# EAGLE board me433_1 (EAGLE 8.1.0)
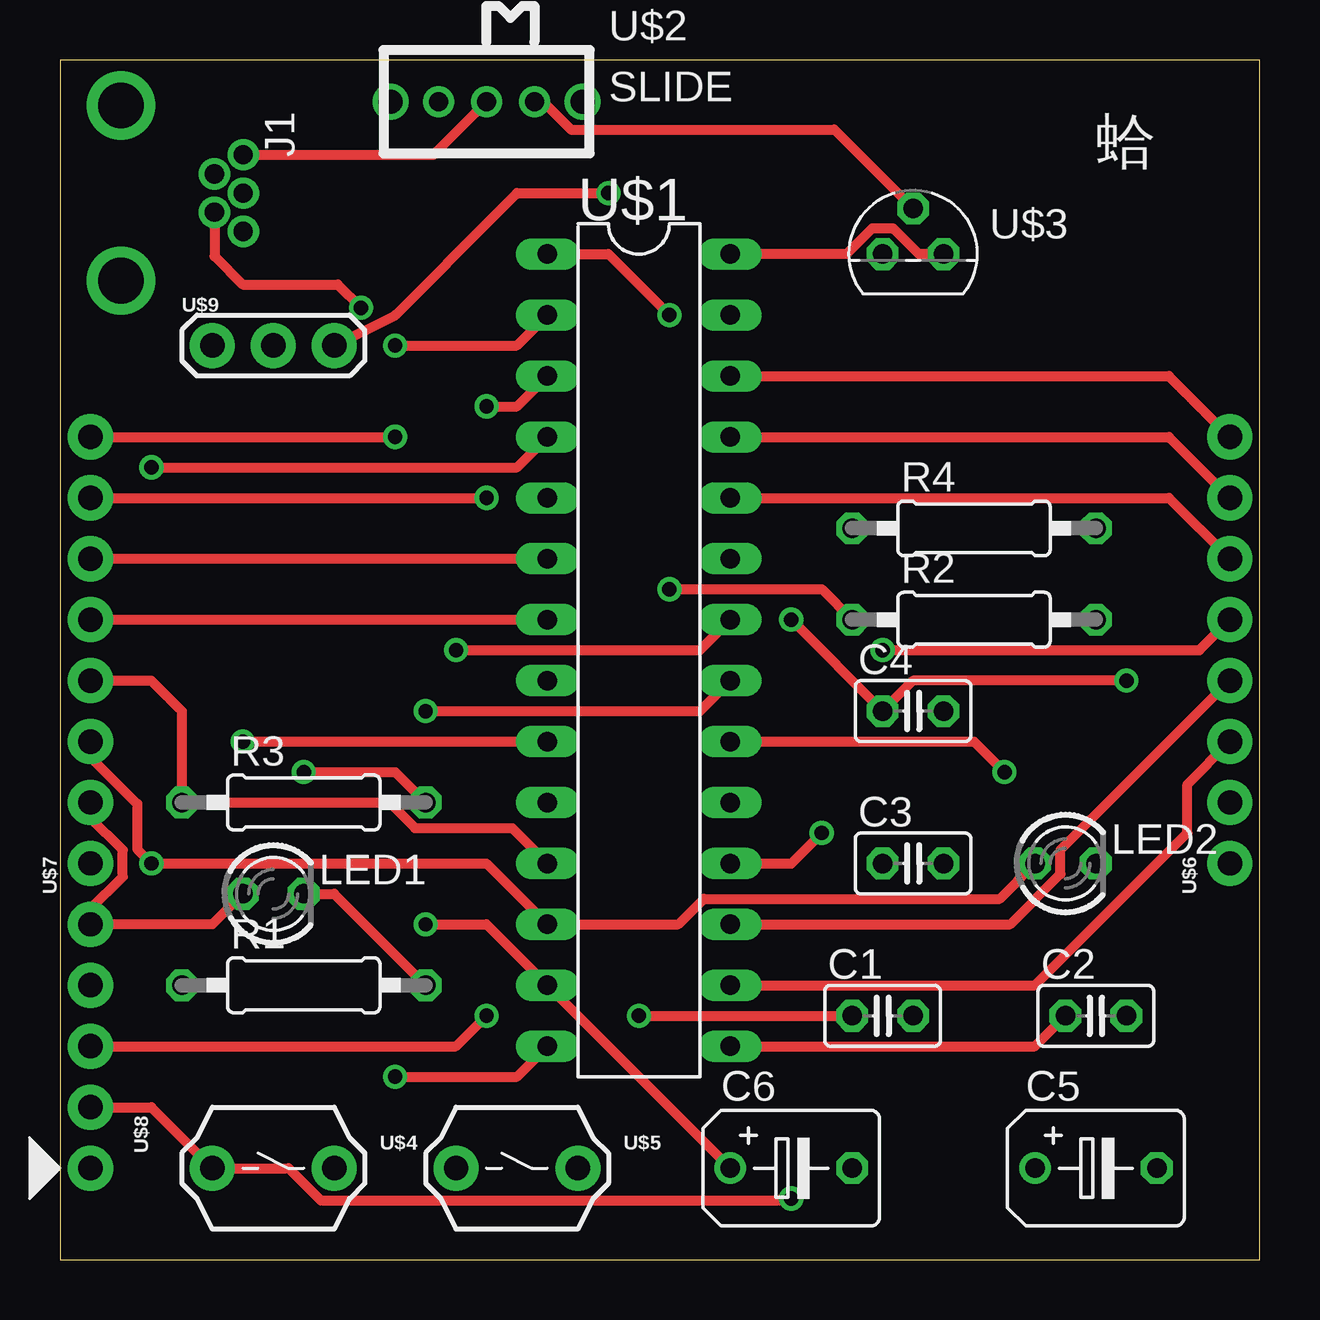
[diagram p0: board, top side]
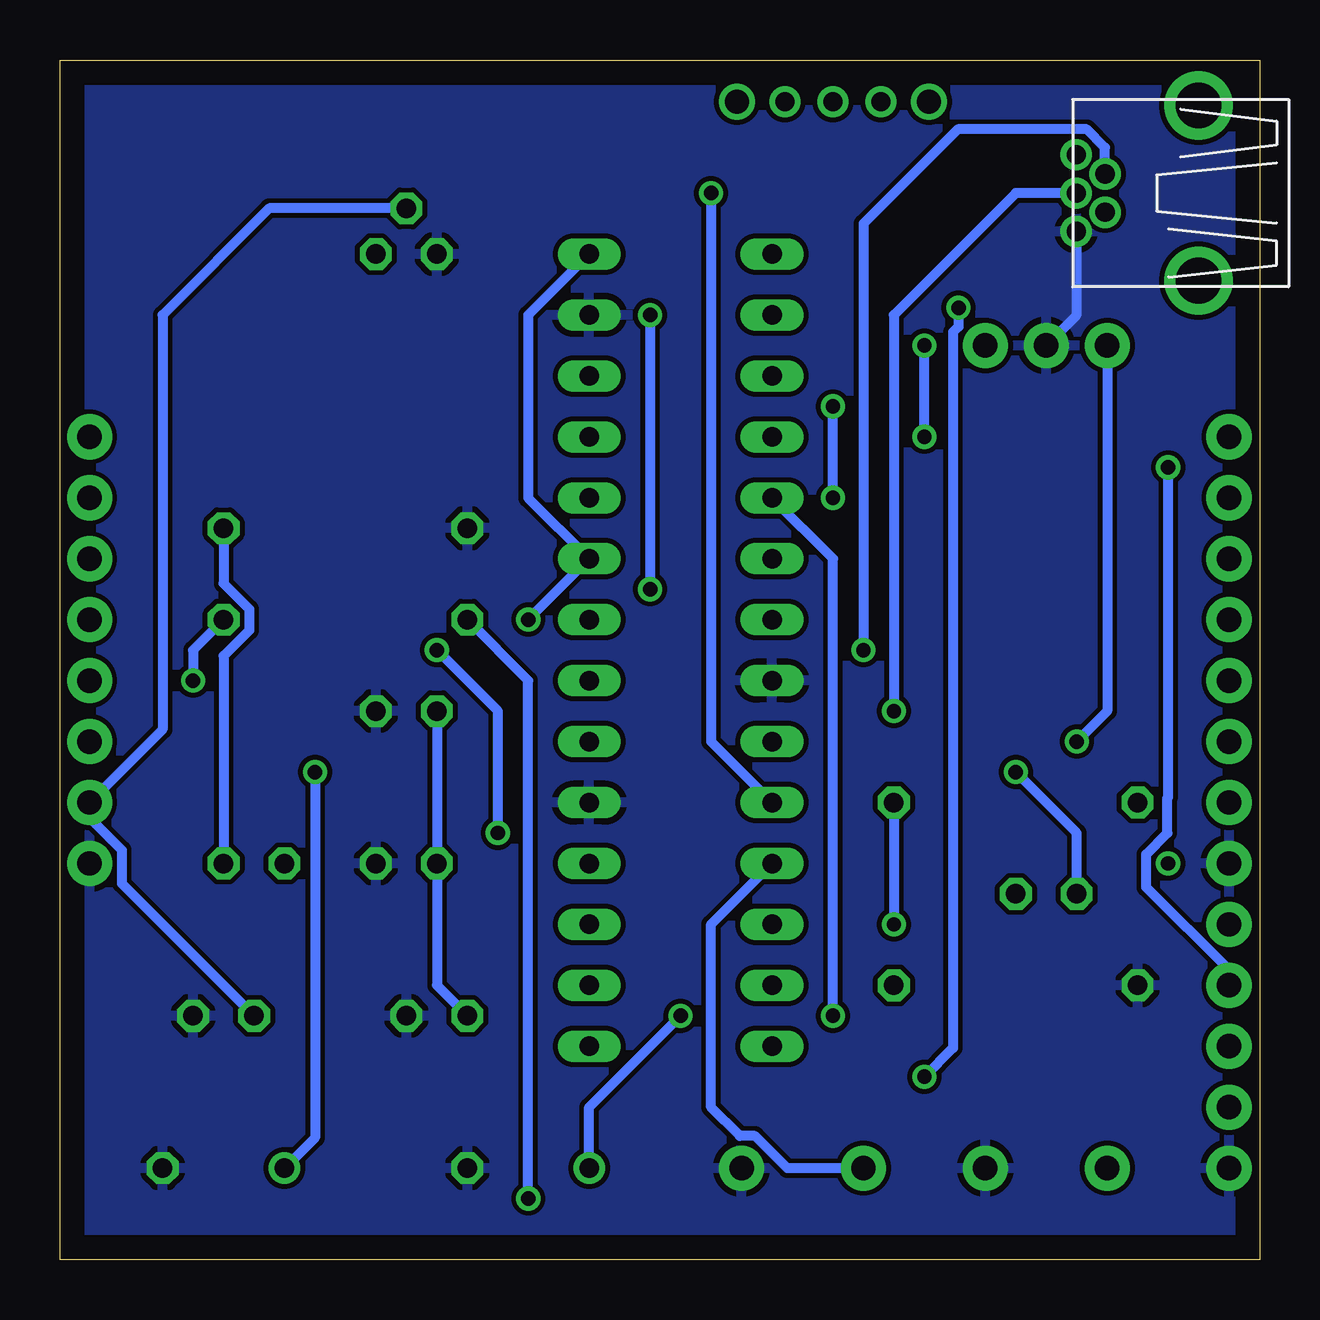
[diagram p1: board, bottom side, seen from below]

Size 50 x 50 mm. Coordinates in mm from the lower left corner, seen from the top.
Outline: 0,0 50,0 50,50 0,50 0,0
Copper layers (1*16): Top 0.035mm / dielectric 1.5mm / Bottom 0.035mm
Design rules "default": minimum track width 10mil, minimum drill 24mil, track to track 8mil, track to pad 8mil, pad to pad 8mil, via to via 8mil, smd to smd 8mil, copper to edge 40mil, drill to drill 8mil, minimum pad ring 10mil, minimum via ring 8mil, stop-mask expansion 4mil, vias tented up to drill 0mil, thermal gap 10mil

## Footprints (pad centres in the part's own frame; a part is rotated, then mirrored left to right if it is on the bottom)
C025-025X050 = drill 0.813 octagon: 1 -1.27,0; 2 1.27,0
B45181B = drill 0.813: + -2.54,0 | drill 0.813 octagon: - 2.54,0
USB-MB-H = drill 0.8: D+ 5.1,0; D- 3.9,0.8; GND 5.1,-1.6; ID 3.9,-0.8; VBUS 5.1,1.6 | drill 1.9: P$6 0,-3.65; P$7 0,3.65
LED3MM = drill 0.813 octagon: A -1.27,0; K 1.27,0
0207/10 = drill 0.813 octagon: 1 -5.08,0; 2 5.08,0
DIL28-3 = drill 0.813 long: 1 -16.51,-3.81; 2 -13.97,-3.81; 3 -11.43,-3.81; 4 -8.89,-3.81; 5 -6.35,-3.81; 6 -3.81,-3.81; 7 -1.27,-3.81; 8 1.27,-3.81; 9 3.81,-3.81; 10 6.35,-3.81; 11 8.89,-3.81; 12 11.43,-3.81; 13 13.97,-3.81; 14 16.51,-3.81; 15 16.51,3.81; 16 13.97,3.81; 17 11.43,3.81; 18 8.89,3.81; 19 6.35,3.81; 20 3.81,3.81; 21 1.27,3.81; 22 -1.27,3.81; 23 -3.81,3.81; 24 -6.35,3.81; 25 -8.89,3.81; 26 -11.43,3.81; 27 -13.97,3.81; 28 -16.51,3.81
SLIDE = drill 0.8: 1 -2,0; 2 0,0; 3 2,0 | drill 1: P$1 -4,0; P$2 4,0
TO92 = drill 0.813 octagon: 1 -1.27,0; 2 0,1.905; 3 1.27,0
PB = drill 1.016 pad 1.88: 1 -2.54,0; 2 2.54,0
1X08 = drill 1.016 pad 1.88: 1 0,0; 2 2.54,0; 3 5.08,0; 4 7.62,0; 5 10.16,0; 6 12.7,0; 7 15.24,0; 8 17.78,0
1X05 = drill 1.016 pad 1.88: 1 0,0; 2 2.54,0; 3 5.08,0; 4 7.62,0; 5 10.16,0
OSC = drill 1.016 pad 1.88: 1 -2.54,0; 2 0,0; 3 2.54,0

## Placement (x,y rotation side)
C1  0.1uF  [C025-025X050]  34.29,10.16 0 top
C2  0.1uF  [C025-025X050]  43.18,10.16 0 top
C3  0.1uF  [C025-025X050]  35.56,16.51 0 top
C4  0.1uF  [C025-025X050]  35.56,22.86 0 top
C5  10uF  [B45181B]  43.18,3.81 0 top
C6  10uF  [B45181B]  30.48,3.81 0 top
J1  USB-MB-H  [USB-MB-H]  2.54,44.45 0 top
LED1  Red  [LED3MM]  8.89,15.24 0 top
LED2  Green  [LED3MM]  41.91,16.51 0 top
R1  330  [0207/10]  10.16,11.43 0 top
R2  10k  [0207/10]  38.1,26.67 0 top
R3  10k  [0207/10]  10.16,19.05 0 top
R4  330  [0207/10]  38.1,30.48 0 top
U$1  PIC32MX250F128B  [DIL28-3]  24.13,25.4 270 top
U$2  SLIDE  [SLIDE]  17.78,48.26 0 top
U$3  MCP1702  [TO92]  35.56,41.91 0 top
U$4  RESET  [PB]  8.89,3.81 0 top
U$5  USER  [PB]  19.05,3.81 0 top
U$6  CONN_08  [1X08]  48.77,16.51 90 top
U$7  CONN_08  [1X08]  1.27,16.51 90 top
U$8  PICKIT3  [1X05]  1.27,3.81 90 top
U$9  8MHz  [OSC]  8.89,38.1 0 top

## Library data of the parts
C1-C6 J1 R1-R4 U$1-U$9 = me433_1
LED1 LED2 = led

## Nets
+3V3: C1.1 C3.1 C4.1 C6.+ LED1.A R2.2 R3.2 U$1.13 U$1.23 U$1.28 U$3.3 U$7.2 U$8.5
+5V: C2.1 U$1.15 U$2.3 U$3.2 U$6.2
A0: U$1.2 U$7.8
A1: U$1.3 U$7.7
A4/LED: LED2.A U$1.12 U$7.3
B2: U$1.6 U$7.6
B3: U$1.7 U$7.5
B4/USER: R3.1 U$1.11 U$5.1 U$7.4
B7: U$1.16 U$6.3
B8: U$1.17 U$6.4
B9: U$1.18 U$6.5
B13: U$1.24 U$6.6
B14: U$1.25 U$6.7
B15: U$1.26 U$6.8
D+: J1.D+ U$1.21
D-: J1.D- U$1.22
GND: C1.2 C2.2 C3.2 C4.2 C5.- C6.- J1.GND R1.1 R4.1 U$1.8 U$1.19 U$1.27 U$3.1 U$4.2 U$5.2 U$6.1 U$7.1 U$8.1 U$9.2
MCLR: R2.1 U$1.1 U$4.1 U$8.2
N$1: J1.VBUS U$2.2
N$2: LED2.K R4.2
N$3: LED1.K R1.2
N$4: U$1.9 U$9.1
N$5: U$1.10 U$9.3
N$6: C5.+ U$1.20
PGC: U$1.5 U$8.3
PGD: U$1.4 U$8.4
USBID: J1.ID U$1.14

## Tracks (layer width: path | path; a pad name or v marks a point on that pad's centre or on a via)
+3V3  (via drill 0.6)
  Top 0.406: U$3.3 35.8,41.91 34.73,42.98 33.85,42.98 32.78,41.91 U$1.28 | LED1.A 6.35,13.97 U$8.5 1.27,14.61 2.62,15.95 2.62,17.07 1.27,18.41 U$7.2 | v10.16,20.32 13.97,20.32 R3.2 | v24.13,10.16 C1.1 | v44.45,24.13 35.56,24.13 C4.1 v30.48,26.67 | v15.24,13.97 17.78,13.97 U$1.13 C6.+
  Bottom 0.406: R3.2 v15.24,13.97 | LED1.A 7.62,17.78 v10.16,20.32 | C6.+ 27.94,6.35 v24.13,10.16 | U$1.28 30.48,39.37 30.48,31.75 U$1.23 v30.48,26.67 | R2.2 44.45,25.4 v44.45,24.13 | C4.1 C3.1 34.29,11.43 C1.1
+5V
  Top 0.406: U$2.3 20.14,48.26 21.3,47.1 32.27,47.1 U$3.2 | U$1.15 40.64,8.89 C2.1
  Bottom 0.406: U$3.2 41.27,43.81 45.72,39.37 45.72,22.1 U$6.2 48.77,18.41 47.42,17.07 47.42,15.67 C2.1
A0  (via drill 0.6)
  Top 0.406: U$7.8 v13.97,34.29 | v13.97,38.1 19.05,38.1 U$1.2
  Bottom 0.406: v13.97,34.29 v13.97,38.1
A1  (via drill 0.6)
  Top 0.406: U$7.7 v17.78,31.75 | v17.78,35.56 19.05,35.56 U$1.3
  Bottom 0.406: v17.78,31.75 v17.78,35.56
A4/LED  (via drill 0.6)
  Top 0.406: U$7.3 1.27,20.95 3.23,19 3.23,17.09 v3.81,16.51 17.78,16.51 U$1.12 25.77,13.97 26.84,15.04 39.17,15.04 LED2.A
B2
  Top 0.406: U$7.6 U$1.6
B3
  Top 0.406: U$7.5 U$1.7
B4/USER
  Top 0.406: U$7.4 3.81,24.13 5.08,22.86 R3.1 13.73,19.05 14.8,17.98 18.85,17.98 U$1.11
  Bottom 0.406: U$5.1 19.69,3.81 21.03,5.16 21.67,5.16 22.86,6.35 22.86,13.97 U$1.11
B7
  Top 0.406: U$1.16 40.64,11.43 46.99,17.78 46.99,19.81 U$6.3
B8
  Top 0.406: U$6.4 41.71,17.07 41.71,16.07 39.61,13.97 U$1.17
B9  (via drill 0.6)
  Top 0.406: U$1.18 30.48,16.51 v31.75,17.78 | v34.29,25.4 47.5,25.4 U$6.5
  Bottom 0.406: v31.75,17.78 31.75,22.86 v34.29,25.4
B13
  Top 0.406: U$1.24 46.23,31.75 U$6.6
B14
  Top 0.406: U$1.25 46.23,34.29 U$6.7
B15
  Top 0.406: U$1.26 46.23,36.83 U$6.8
D+  (via drill 0.6)
  Top 0.406: v15.24,22.86 26.67,22.86 U$1.21
  Bottom 0.406: J1.D+ 10.16,44.45 15.24,39.37 v15.24,22.86
D-  (via drill 0.6)
  Top 0.406: v16.51,25.4 26.67,25.4 U$1.22
  Bottom 0.406: J1.D- 6.44,46.35 7.2,47.11 12.58,47.11 16.51,43.18 v16.51,25.4
GND
  Bottom 0.406: J1.GND 7.64,39.35 U$9.2
  pour Bottom: -1.27,50.8 50.8,50.8 50.8,49.53 50.8,-1.27 -1.27,-1.27
MCLR  (via drill 0.6)
  Top 0.406: U$8.2 3.81,6.35 U$4.1 9.53,3.81 10.87,2.46 30,2.46 30.07,2.54 v30.48,2.54 | U$1.1 22.86,41.91 v25.4,39.37 | v25.4,27.94 31.75,27.94 R2.1
  Bottom 0.406: v30.48,2.54 30.48,24.13 R2.1 | v25.4,39.37 v25.4,27.94
N$1
  Top 0.406: J1.VBUS 15.57,46.05 U$2.2
N$2
  Bottom 0.406: R4.2 43.18,28.18 42.11,27.11 42.11,26.23 43.18,25.16 LED2.K
N$3
  Top 0.406: LED1.K 11.43,15.24 R1.2
N$4  (via drill 0.6)
  Top 0.406: v7.62,21.59 U$1.9
  Bottom 0.406: U$9.1 6.35,22.86 v7.62,21.59
N$5  (via drill 0.6)
  Top 0.406: U$9.3 13.99,39.37 16.15,41.53 16.15,41.55 19.05,44.45 v22.86,44.45
  Bottom 0.406: v22.86,44.45 22.86,21.59 U$1.10
N$6  (via drill 0.6)
  Top 0.406: U$1.20 38.1,21.59 v39.37,20.32
  Bottom 0.406: v39.37,20.32 39.37,5.08 C5.+
PGC  (via drill 0.6)
  Top 0.406: U$8.3 16.51,8.89 v17.78,10.16
  Bottom 0.406: v17.78,10.16 17.78,29.21 U$1.5
PGD  (via drill 0.6)
  Top 0.406: v3.81,33.02 19.05,33.02 U$1.4
  Bottom 0.406: U$8.4 1.27,12.07 4.72,15.52 4.72,16.89 3.83,17.77 3.83,19.25 3.81,19.28 v3.81,33.02
USBID  (via drill 0.6)
  Top 0.406: v13.97,7.62 19.05,7.62 U$1.14 | J1.ID 6.44,41.82 7.62,40.64 11.58,40.64 v12.55,39.67
  Bottom 0.406: 12.78,8.81 v13.97,7.62 12.78,8.81 | v12.55,39.67 12.55,38.88 12.78,38.66 12.78,8.81

## Text on the board
tNames: 蛤